# Altium PCB Test-USB_SHUTDOWN.PcbDoc
Units mm, origin at the board's own origin, x right, y up, seen from the top; angles counter-clockwise.
Board outline 62 x 18.36 mm, 2 copper layers (Component Side, Bottom Layer), stack 1.571 mm thick; 11 components, 9 nets, 44 pads, 2 vias.
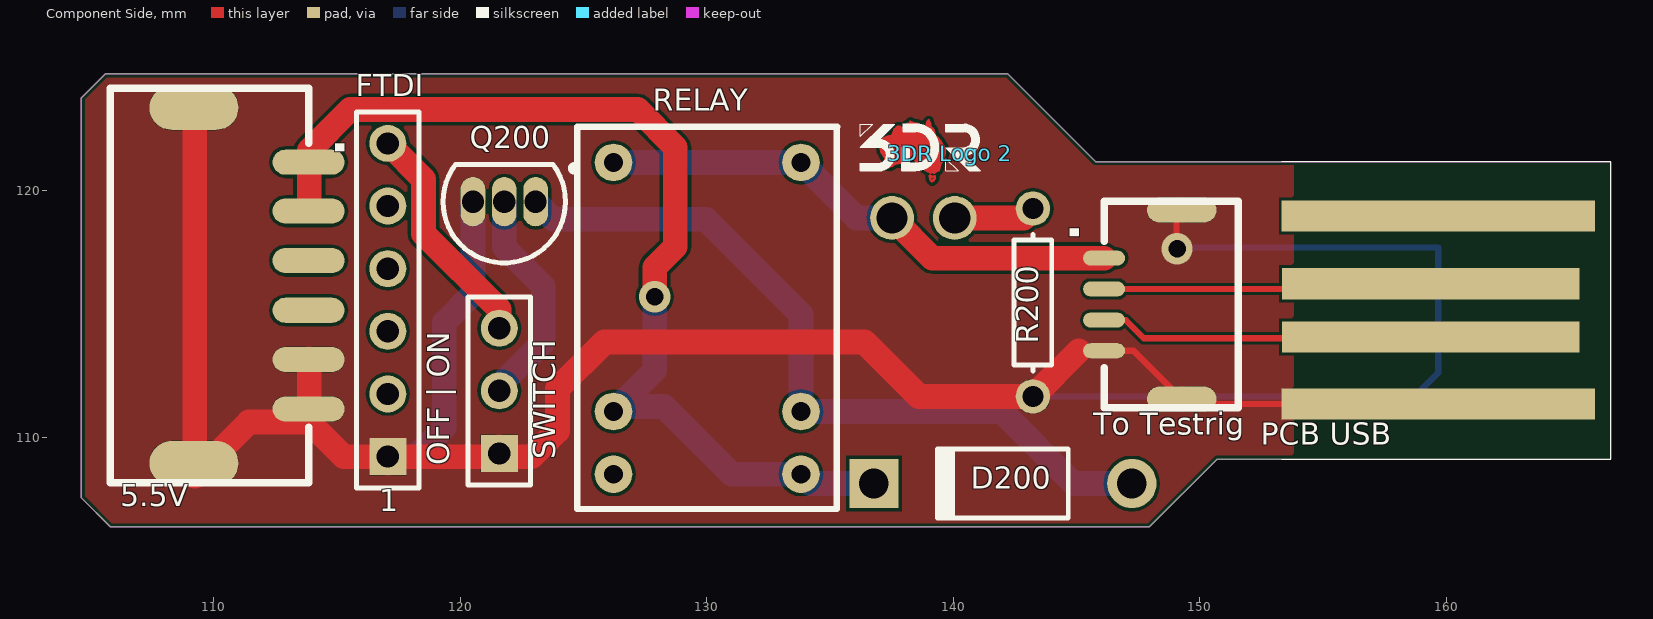
[diagram p0: Component Side view]
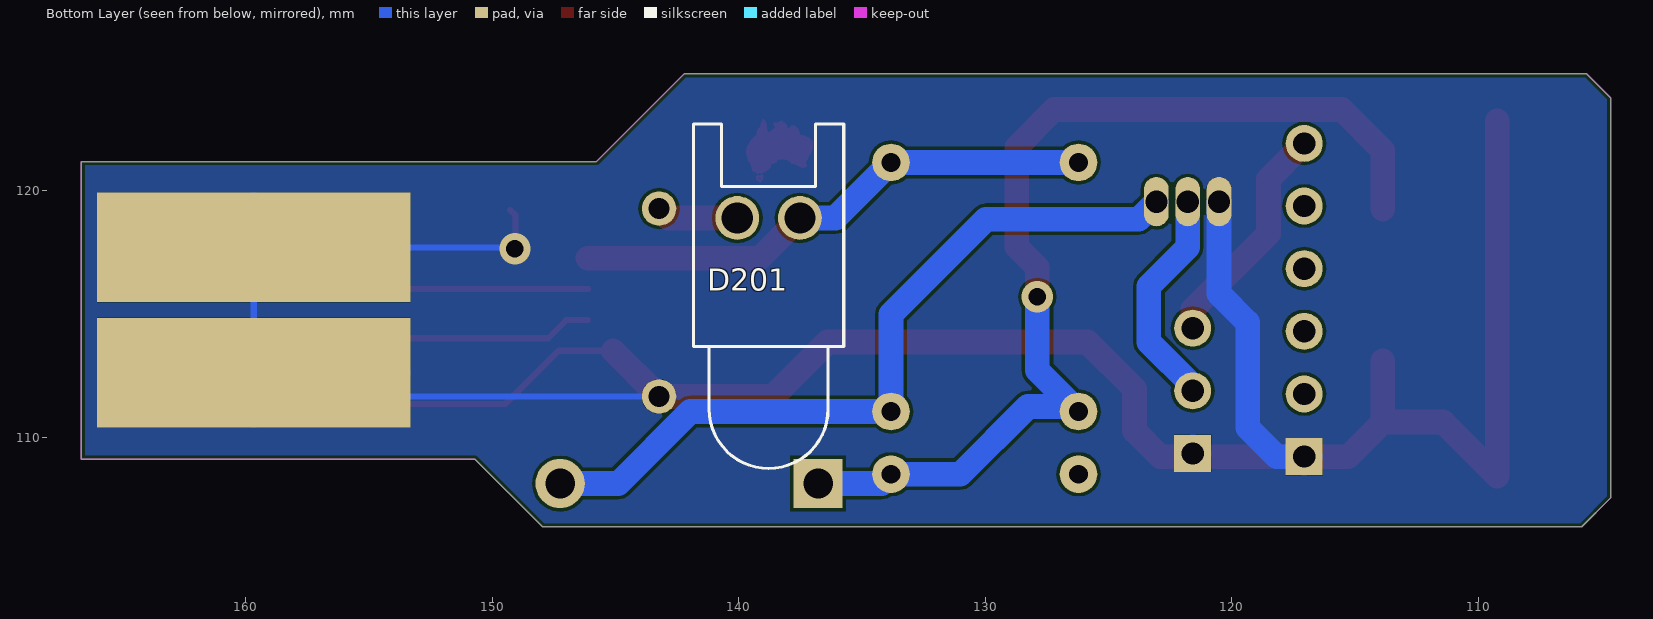
[diagram p1: Bottom Layer view, seen from below]

## Layer stack, top to bottom
Top Solder: solder mask 0.0102, Solder Resist, Dk 3.5
Component Side: signal copper 0.0356
Dielectric 1: core 1.5, FR-4, Dk 4.2
Bottom Layer: signal copper 0.0356
Solder Side: solder mask 0.0102, Solder Resist, Dk 3.5

## Board outline
104.648,107.544 104.648,123.774 105.613,124.739 142.215,124.739 145.771,121.183 166.649,121.183 166.649,109.118 150.698,109.118 147.955,106.375 105.816,106.375

## Design rules (kind name [scope] priority, off if disabled: settings)
Clearance "Polygon clearance" [InPolygon vs InPolygon] p1: gap=0.3
Clearance Clearance_1 [All] p2: gap=0.127
Clearance mdViaVia [IsVia vs IsVia] p3: gap=0.127
Clearance mdPadVia [IsPad vs IsVia] p4: gap=0.127
Clearance mdPadPad [IsPad vs IsPad] p5: gap=0.127
Clearance mdWireVia [(InLayerClass('Signal Layers') AND IsTrack) vs IsVia] p6: gap=0.127
Clearance mdWirePad [(InLayerClass('Signal Layers') AND IsTrack) vs IsPad] p7: gap=0.127
Clearance mdWireWire [(InLayerClass('Signal Layers') AND IsTrack) vs (InLayerClass('Signal Layers') AND IsTrack)] p8: gap=0.127
ComponentClearance ComponentClearance_1 [(HasFootprint('ed') OR HasFootprint('CON-DF17-80M') OR HasFootprint('DF40-70_RECEPTICAL') OR HasFootprint('PSM') OR HasFootprint('PEM-SMTSO-M1.6-2-ET') OR HasFootprint('HEADER_1X06-FTDI') OR HasFootprint('3DR-WORDMARK-short'))] p1: gap=0 collisioncheckmode=3 verticalgap=0 showdistances=FALSE
ComponentClearance [All] p2 off: gap=0.076 collisioncheckmode=3 verticalgap=0 showdistances=FALSE
DiffPairsRouting [All] p1: maxlimit=0.254 minlimit=0.254 mostfreqgap=0.254 toplayer_minwidth=0.127 toplayer_maxwidth=0.381 toplayer_prefwidth=0.381 bottomlayer_minwidth=0.127 bottomlayer_maxwidth=0.381 bottomlayer_prefwidth=0.381 maxuncoupledlength=12.7
HoleSize [All] p1: absolutevalues=TRUE maxlimit=2540 minlimit=0.2 maxpercent=80.000 minpercent=20.000
HoleToHoleClearance [All] p1: gap=0.203 allowstackedmicrovias=TRUE
MinimumSolderMaskSliver [All] p1 off: minsoldermaskwidth=0.254
PasteMaskExpansion [All] p1: expansion=0.025
PolygonConnect PolygonConnect_1 [InPolygon] p1: connectstyle=Direct reliefconductorwidth=0.254 reliefentries=4 polygonreliefangle="90 Angle" airgapwidth=0.254
PolygonConnect ThermalVias [IsVia] p2: connectstyle=Direct reliefconductorwidth=0.254 reliefentries=4 polygonreliefangle="90 Angle" airgapwidth=0.254
RoutingVias [All] p1: holewidth=0.2 width=0.5 viastyle="Through Hole" minholewidth=0.2 minwidth=0.5 maxholewidth=0.711 maxwidth=1.27
SilkToBoardRegionClearance [All] p1 off:
SilkToSilkClearance [All] p1 off: silktosilkclearance=0.254
SilkToSolderMaskClearance [IsPad] p1 off: minsilkscreentomaskgap=0.254 clearancetoexposedcopper=TRUE
SolderMaskExpansion [All] p1: expansion=0.025
UnpouredPolygon [All] p1: allowunpoured=FALSE
Width [All] p1: maxlimit=1 minlimit=0.15 preferedwidth=0.254
20 further rules are at their usual default settings.

## Components (designator, comment, footprint, x,y, rotation, side; value= is the part's Value field where it differs from the comment)
"3DR Logo 2" "DO NOT PLACE" 3DR_AU 139.852,121.514 r0 top
5.5V "CLICKMATE_2_6" CLICKMATE_H6_2MM 106.959,116.154 r90 top
D200 "Diode 1N4001" DO-41 142.011,108.128 r180 top
D201 "LED0" LED-0 138.786,118.897 r180 bottom
FTDI "Header 6" HDR1X6 117.069,109.22 r90 top
"PCB USB" "PCB_USBWITHBACK" PCB_USB_WBACK 153.314,118.974 r270 top
Q200 "2N3906" TO-92A 121.793,119.558 r90 top
R200 "Res1" AXIAL-0.3 143.231,115.468 r90 top
RELAY "WJ102-1C" WJ1D2-1C 130.023,111.049 r90 top
SWITCH "Header 3" HDR1X3 121.59,109.347 r90 top
"To Testrig" "CLICKMATE_1.25_4" CLICKMATE_V4 151.562,115.392 r270 top

## Footprints (in the part's own frame and the unit in brackets; to place one, negate y for a bottom-side part, rotate by r counter-clockwise, add the part's x,y. Pads: shape width x height; smd on the part's side, far side on the other; paste and mask are expansions set on the pad)
3DR_AU [mm]
  Component Side region: -2.175,1 -2.25,0.925 -2.25,0.825 -2.4,0.675 -2.625,0.675 -2.8,0.5 -2.8,0.175 -2.7,0.075 -2.7,-0.1 -2.525,-0.275 -2.525,-0.425 -2.575,-0.475 -2.525,-0.525 -2.4,-0.525 -2.325,-0.45 -2.225,-0.45 -2.15,-0.375 -2.025,-0.375 -1.85,-0.2 -1.475,-0.2 -1.35,-0.325 -1.325,-0.3 -1.225,-0.3 -1.1,-0.425 -1.1,-0.55 -1.075,-0.55 -0.925,-0.7 -0.85,-0.7 -0.8,-0.75 -0.525,-0.75 -0.4,-0.625 -0.4,-0.425 -0.25,-0.275 -0.25,-0.1 -0.175,-0.025 -0.175,0.175 -0.275,0.275 -0.275,0.35 -0.375,0.45 -0.375,0.5 -0.4,0.5 -0.5,0.6 -0.5,0.625 -0.65,0.775 -0.65,0.95 -0.725,1.025 -0.775,1.025 -0.775,1.15 -0.85,1.225 -0.85,1.3 -0.875,1.3 -0.925,1.25 -0.925,1 -1,0.925 -1,0.825 -1.025,0.8 -1.075,0.85 -1.2,0.85 -1.325,0.975 -1.325,0.975 -1.375,1.025 -1.35,1.05 -1.35,1.175 -1.4,1.225 -1.575,1.225 -1.625,1.175 -1.725,1.175 -1.725,1.15 -1.775,1.1 -1.775,1 -1.8,1 -1.825,0.975 -1.85,1 -1.95,1 -2.025,1.075 -2.125,1.075
  Component Side lines w0.1: -2.825,0.494 -2.795,0.499 -2.77,0.509 -2.75,0.524 -2.728,0.549 -2.706,0.578 -2.682,0.61 -2.658,0.613 -2.637,0.62 -2.617,0.63 -2.593,0.645 -2.568,0.661 -2.54,0.675 -2.518,0.681 -2.495,0.685 -2.471,0.686 -2.441,0.688 -2.412,0.692 -2.384,0.701 -2.356,0.717 -2.334,0.736 -2.316,0.759 -2.301,0.784 -2.289,0.811 -2.277,0.847 -2.267,0.884 -2.256,0.92 -2.244,0.955 -2.229,0.986 -2.217,0.975 -2.209,0.969 -2.206,0.968 -2.204,0.967 -2.201,0.968 -2.197,0.97 -2.193,0.973 -2.187,0.98 -2.177,0.989 -2.164,0.999 -2.162,1.021 -2.157,1.039 -2.149,1.053 -2.132,1.069 -2.11,1.078 -2.086,1.083 -2.059,1.083 -2.033,1.081 -2.008,1.077 -1.977,1.042 -1.947,1.014 -1.916,0.995 -1.891,0.986 -1.864,0.981 -1.834,0.982 -1.801,0.988 -1.762,0.999 -1.764,1.02 -1.769,1.041 -1.776,1.06 -1.78,1.078 -1.781,1.095 -1.776,1.11 -1.768,1.119 -1.756,1.127 -1.74,1.134 -1.743,1.147 -1.742,1.158 -1.737,1.168 -1.728,1.176 -1.712,1.186 -1.691,1.194 -1.668,1.201 -1.644,1.207 -1.618,1.211 -1.594,1.214 -1.572,1.216 -1.554,1.218 -1.542,1.219 -1.543,1.232 -1.546,1.242 -1.551,1.249 -1.56,1.256 -1.57,1.26 -1.58,1.263 -1.588,1.267 -1.591,1.27 -1.593,1.273 -1.594,1.278 -1.593,1.284 cw(c-1.915,0.11) -1.386,1.206 -1.362,1.211 -1.344,1.213 -1.337,1.213 -1.331,1.213 -1.327,1.211 -1.323,1.209 -1.321,1.206 -1.32,1.201 -1.321,1.187 -1.326,1.167 -1.334,1.142 -1.347,1.14 -1.358,1.136 -1.367,1.13 -1.371,1.124 -1.374,1.118 -1.374,1.111 -1.372,1.104 -1.369,1.099 -1.363,1.093 -1.354,1.088 -1.386,1.025 -1.353,1.001 -1.318,0.973 -1.28,0.943 -1.241,0.913 -1.207,0.888 -1.172,0.865 -1.137,0.846 -1.103,0.831 -1.069,0.821 -1.036,0.818 ccw(c-1.47,1.161) -0.971,0.921 -0.965,0.952 -0.96,0.988 -0.955,1.028 -0.95,1.071 -0.944,1.115 -0.937,1.157 -0.928,1.197 -0.917,1.235 -0.903,1.267 -0.887,1.296 -0.866,1.319 -0.842,1.336 cw(c-2.095,0.858) -0.764,1.025 -0.74,1.023 -0.719,1.016 -0.701,1.005 -0.685,0.991 -0.668,0.967 -0.654,0.939 -0.644,0.908 -0.634,0.868 -0.627,0.826 -0.621,0.786 -0.615,0.748 -0.608,0.714 -0.579,0.695 -0.548,0.677 -0.523,0.662 -0.499,0.644 -0.479,0.623 -0.462,0.599 -0.45,0.577 -0.441,0.557 -0.433,0.544 -0.424,0.532 -0.412,0.522 -0.396,0.513 -0.375,0.506 -0.364,0.466 -0.348,0.43 -0.328,0.396 -0.299,0.355 -0.266,0.315 -0.233,0.273 -0.226,0.228 -0.217,0.187 -0.209,0.152 -0.201,0.117 -0.194,0.079 -0.192,0.047 -0.194,0.015 -0.201,-0.016 -0.211,-0.047 -0.225,-0.086 -0.239,-0.125 -0.251,-0.165 -0.258,-0.206 cw(c-0.439,-0.2) -0.336,-0.349 ccw(c1.383,-1.062) -0.44,-0.686 ccw(c-0.385,-1.046) -0.638,-0.784 -0.659,-0.77 -0.676,-0.76 -0.689,-0.752 -0.7,-0.747 -0.711,-0.746 -0.723,-0.748 -0.737,-0.754 -0.754,-0.764 -0.777,-0.777 -0.836,-0.745 -0.892,-0.716 -0.944,-0.686 -0.982,-0.662 -1.018,-0.634 -1.052,-0.602 -1.084,-0.563 -1.114,-0.518 -1.103,-0.493 -1.098,-0.472 -1.098,-0.455 -1.106,-0.435 -1.121,-0.415 -1.143,-0.392 -1.154,-0.395 -1.162,-0.397 -1.167,-0.398 -1.172,-0.397 -1.175,-0.396 -1.178,-0.395 -1.18,-0.392 -1.18,-0.39 -1.181,-0.386 -1.18,-0.378 -1.178,-0.369 -1.175,-0.356 -1.172,-0.342 -1.174,-0.329 -1.177,-0.32 -1.18,-0.314 -1.182,-0.312 -1.185,-0.31 -1.188,-0.31 -1.191,-0.311 -1.195,-0.313 -1.199,-0.316 -1.206,-0.325 -1.214,-0.337 -1.222,-0.351 -1.23,-0.365 -1.236,-0.375 -1.241,-0.375 -1.244,-0.374 -1.247,-0.372 -1.25,-0.368 -1.251,-0.362 -1.25,-0.348 -1.247,-0.331 -1.242,-0.313 -1.234,-0.284 -1.231,-0.27 -1.23,-0.264 -1.231,-0.258 cw(c-1.322,-0.176) -1.294,-0.296 -1.311,-0.317 -1.323,-0.333 -1.331,-0.342 -1.333,-0.344 -1.336,-0.346 -1.338,-0.346 -1.34,-0.346 -1.342,-0.345 -1.344,-0.343 -1.35,-0.333 -1.359,-0.316 -1.37,-0.291 -1.388,-0.263 -1.412,-0.241 -1.442,-0.223 -1.476,-0.21 -1.513,-0.201 -1.553,-0.195 -1.602,-0.193 -1.65,-0.195 -1.697,-0.201 -1.739,-0.209 -1.775,-0.22 ccw(c-1.007,-2.013) -1.982,-0.323 -2.008,-0.388 ccw(c-1.816,-1.986) -2.216,-0.427 -2.256,-0.446 -2.292,-0.469 -2.326,-0.492 -2.352,-0.508 -2.379,-0.522 -2.407,-0.531 -2.439,-0.534 -2.475,-0.531 -2.509,-0.524 -2.536,-0.518 -2.558,-0.512 -2.567,-0.507 -2.573,-0.501 -2.576,-0.496 -2.576,-0.489 -2.575,-0.481 -2.571,-0.471 -2.564,-0.456 -2.553,-0.437 -2.54,-0.414 -2.527,-0.362 -2.553,-0.324 -2.579,-0.286 -2.594,-0.261 -2.606,-0.236 -2.615,-0.209 -2.618,-0.181 -2.773,0.066 -2.751,0.073 -2.773,0.122 -2.789,0.169 -2.8,0.213 -2.807,0.256 -2.812,0.311 -2.815,0.368 -2.818,0.428 -2.825,0.494 ; -0.804,-0.956 -0.787,-0.997 -0.795,-1.004 -0.786,-1.051 -0.73,-1.135 -0.712,-1.139 -0.664,-1.065 -0.642,-1.082 -0.599,-1.008 -0.594,-0.934 -0.599,-0.921 -0.703,-0.942 -0.785,-0.904 -0.804,-0.899 -0.804,-0.956
  silkscreen extent -3.62,-0.71 1.24,1.19
AXIAL-0.3 [mm] "Axial Device, Thru-Hole; 2 Leads; 0.3 in Pin Spacing"
  round 1.4 hole 0.85: 1(-3.81,0) 2(3.81,0)
  silkscreen extent -2.77,-0.76 2.77,0.76
CLICKMATE_H6_2MM [mil]
  rrect100% 40x115 smd: 1(197,-271.65) 2(119,-271.65) 3(40,-271.65) 4(-39.37,-271.65) 5(-118.11,-271.65) 6(-196.85,-271.65)
  rrect100% 71x142 smd: GND(-283.46,-88.58) GND(284,-88.58)
  silkscreen extent -315,-272 315,45, body extent -315,-295 315,40, height 270
CLICKMATE_V4 [mil] "5023820470"
  rrect100% 24x67 smd: 1(-73.82,-214.57) 2(-24.61,-214.57) 3(25,-214.57) 4(74,-214.57)
  rrect100% 40x111 smd: GND(-150.59,-90.55) GND(151,-90.55)
  silkscreen extent -164,-215 165,0, body extent -164,-237 164,-3, height 179
DO-41 [mm] "Diode, Axial; Body 5.2 x 2.7 mm (LxDia. max), Lead Dia. 0.86 mm (max)"
  round 2 hole 1.2: 1(-5.23,0)
  rect 2x2 hole 1.2: 2(5.23,0)
  silkscreen extent -2.65,-1.4 2.75,1.4
HDR1X3 [mm] "Connector; Header; 3 Position"
  rect 1.5x1.5 hole 0.9: 1(0,0)
  round 1.5 hole 0.9: 2(2.54,0) 3(5.08,0)
  silkscreen extent -1.27,-1.27 6.35,1.27
HDR1X6 [mm] "Connector; Header; 6 Position"
  rect 1.5x1.5 hole 0.9: 1(0,0)
  round 1.5 hole 0.9: 2(2.54,0) 3(5.08,0) 4(7.62,0) 5(10.16,0) 6(12.7,0)
  silkscreen extent -1.27,-1.27 13.97,1.27
LED-0 [mil] "LED; 2 Leads"
  round 70 hole 50: 1(50,0) 2(-50,0)
  silkscreen extent -120,-400 120,150
PCB_USB_WBACK [mil]
  rect 50x475 smd: DM(108,238) DP(193,238)
  rect 175x500 smd far side: GND(50,250) GND(250,250)
  rect 50x500 smd: GND(300,250) V(0,250)
  silkscreen extent -88,0 388,525
TO-92A [mm] "TO, Flat Index; 3 In-Line, Axial Leads; Body Dia. 4.5mm; Leads 0.51 x 0.48 mm (max)"
  oval 2x1 hole 0.9: 1(0,-1.27) 2(0,0) 3(0,1.27)
  silkscreen extent -2.48,-2.96 1.5,2.48, body extent -2.5,-2.5 1.5,2.5, height 6.86
WJ1D2-1C [mil]
  round 60 hole 30: co(397.64,-149.61) co(397.64,149.61) coil-1(0,149.61) coil-2(0,-149.61) nc(-100,149.61) no(-100,-149.61)
  silkscreen extent -156,-208 455,208, body extent -158,-208 454,209, height 496

## Part data
"3DR Logo 2": library part 3DR_LOGO
5.5V: "Connector, Header, 6Pos, 2.54MM, Vert, THT, Au"
D200: "1 Amp General Purpose Rectifier"
D201: "Typical INFRARED GaAs LED"
FTDI: "Header, 6-Pin"
Q200: "PNP General Purpose Amplifier"
R200: "Resistor"
SWITCH: "Header, 3-Pin"
"To Testrig": "Connector, Rcpt, 4Pos, 1.25MM, W/B, VERT, SMD, Tin"

## Via types
v1: diameter 1.27, hole 0.711, Component Side to Bottom Layer, tented both sides, 2 vias

## Nets (pads, with @x,y where several pads share a name; then routed paths per layer and width w, separated by ;. In a path a pad name is that pad's centre, name@x,y a point inside that pad or via, vN(x,y) a via of type N, cw(c..) or ccw(c..) an arc to the next point about the centre after c; other vN are vias at no path point)
GND: 5.5V.5 5.5V.6 5.5V.GND "PCB USB.GND" "To Testrig.4" "To Testrig.GND" FTDI.1 Q200.3 R200.1 SWITCH.1 | length 120.9
  Component Side w0.254: 145.085,113.513 146.112,113.513 147.306,113.513 149.262,111.557 149.465,111.354 159.664,111.354 ; v1(149.073,117.653) 149.047,117.678 149.047,119.003 149.262,119.217
  Component Side w1: 5.5V.GND@109.235,122.834 109.235,108.421 111.435,110.621 113.885,110.621 ; 5.5V.5@113.885,113.106 113.885,110.621 ; 145.085,113.513 R200.1 138.608,111.658 136.398,113.868 125.857,113.868 123.952,111.963 123.952,110.261 122.911,109.22 FTDI.1 115.286,109.22 113.885,110.621
  Bottom Layer w0.254: R200.1 158.699,111.658 159.664,112.624 159.664,117.704 149.123,117.704 v1(149.073,117.653)
  Bottom Layer w1: FTDI.1 118.186,109.22 119.355,110.388 119.355,114.656 120.523,115.824 Q200.3
Net5.5V_1: 5.5V.1 5.5V.2 D200.2 RELAY.coil-1 RELAY.no | length 42
  Component Side w1: 5.5V.2@113.885,119.253 113.885,120.625 113.885,121.632 115.55,123.297 127.198,123.297 128.727,121.768 128.727,117.729 127.889,116.891 v1(127.889,115.697)
  Bottom Layer w1: RELAY.coil-1 RELAY.coil-1@126.426,111.252 ; v1(127.889,115.697) 127.889,112.715 RELAY.coil-1@126.426,111.252 ; D200.2 134.204,108.128 RELAY.no 131.013,108.509 128.27,111.252 RELAY.coil-1@126.426,111.252
NetD200_1: D200.1 Q200.1 RELAY.coil-2 | length 31.2
  Bottom Layer w1: Q200.1 123.774,118.847 129.972,118.847 133.823,114.996 RELAY.coil-2 141.964,111.049 144.885,108.128 D200.1
NetD201_2: D201.2 R200.2 | length 3.3
  Component Side w1: D201.2 142.85,118.897 R200.2
NetFTDI_6: FTDI.6 SWITCH.3 | length 9.4
  Component Side w1: FTDI.6 118.516,120.472 118.516,118.262 121.59,115.189 SWITCH.3
NetQ200_2: Q200.2 SWITCH.2 | length 9.1
  Bottom Layer w1: SWITCH.2 121.59,112.09 123.368,113.868 123.368,116.129 121.793,117.704 Q200.2
USB_UP_N: "PCB USB.DM" "To Testrig.2" | length 13
  Component Side w0.254: 146.112,116.017 159.146,116.017
USB_UP_P: "PCB USB.DP" "To Testrig.3" | length 13.6
  Component Side w0.254: 146.112,114.757 146.99,114.757 147.726,114.021 159.309,114.021 159.36,114.071
VBUS_UP: "To Testrig.1" D201.1 RELAY.co | length 21.5
  Component Side w1: D201.1 139.146,117.267 146.112,117.267
  Bottom Layer w1: RELAY.co@126.223,121.149 133.823,121.149 136.074,118.897 D201.1
pads on no net: 5.5V.3 5.5V.4 "PCB USB.V" FTDI.2 FTDI.3 FTDI.4 FTDI.5 RELAY.nc

## Polygon pours and split planes (outlines as drawn)
GND on Component Side "gnd" (solid, remove dead copper, pour order 21): 107.877,138.99 153.81,138.99 153.81,93.803 112.376,93.803 98.498,113.771
GND on Bottom Layer "gnd" (solid, remove dead copper, pour order 21): 54.737,181.254 59.817,176.174 176.936,176.174 176.936,110.566 206.273,81.229 168.681,43.637 164.541,43.637 83.337,43.637 74.854,35.154 26.899,83.109 18.237,83.109

## Keep-outs
Keep-Out Layer:
  the board outline again, w0.025

## Silkscreen, mask and mechanical layers (free items; w line width, h text height)
Top Overlay:
  text "OFF | ON" at 119.863,108.864 h1.52 r90
  text "1" at 116.713,106.705 h1.52
Mechanical 1:
  lines w0.254: 104.648,107.544 105.816,106.375 147.955,106.375 150.698,109.118 153.314,109.118 166.649,109.118 166.649,121.183 153.314,121.183 145.771,121.183 142.215,124.739 105.613,124.739 104.648,123.774 104.648,107.544